# Altium PCB PCB_v0.1.pcbdoc
Units mil, origin at the board's own origin, x right, y up, seen from the top; angles counter-clockwise.
Board outline 2191.1 x 5068.11 mil, 2 copper layers (Top Layer, Bottom Layer); 16 components, 48 nets, 83 pads, 11 vias.
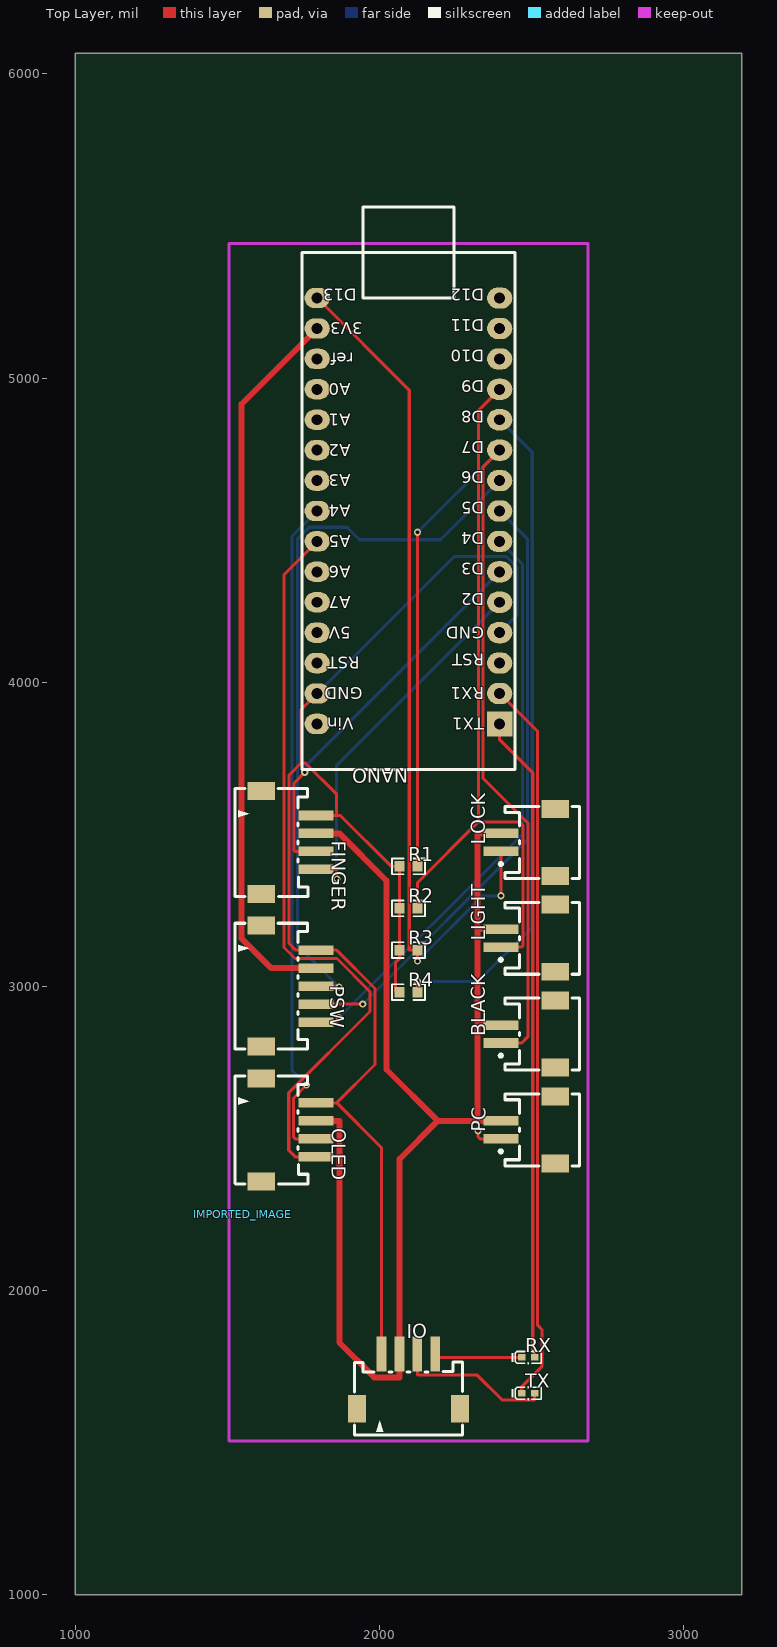
[diagram p0: Top Layer view]
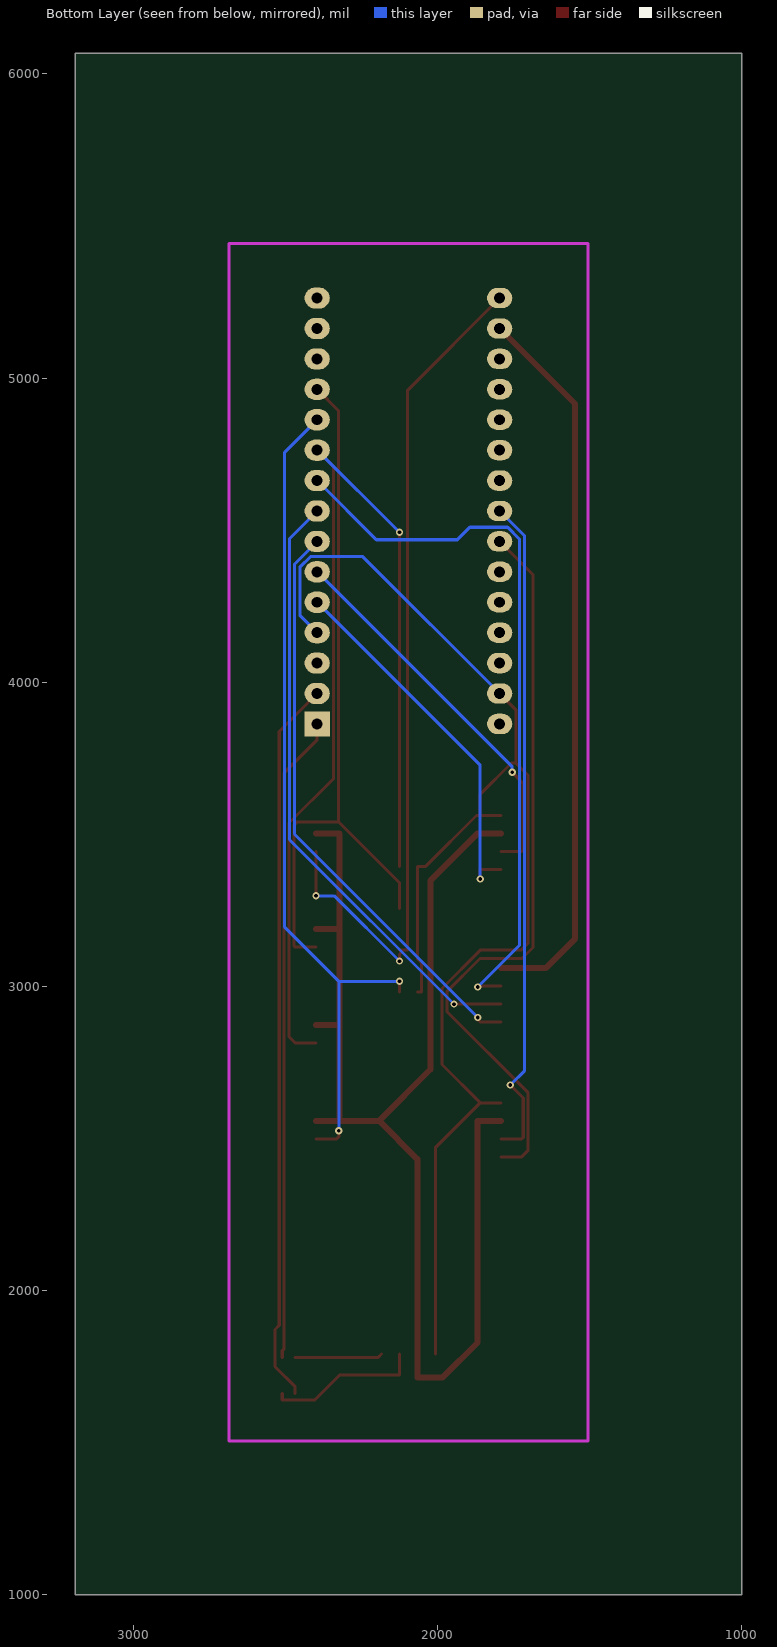
[diagram p1: Bottom Layer view, seen from below]

## Layer stack, top to bottom
Top Layer: signal copper (thickness not stored)
Dielectric: dielectric 12.6, FR-4, Dk 4.8
Bottom Layer: signal copper (thickness not stored)

## Board outline
3191.1,1000 1000,1000 1000,6068.11 3191.1,6068.11

## Components (designator, comment, footprint, x,y, rotation, side; value= is the part's Value field where it differs from the comment)
BLACK "ZH1.5-2P-WT 黑暗模式" CONN-SMD_ZH1.5-2P-WT 2489.25,2843.58 r90 top
FINGER "ZH1.5-4P-WT 指纹" CONN-TH_ZH1.5-4P-WT 1701.85,3473.5 r270 top
IMPORTED_IMAGE "IMPORTED_IMAGE" IMPORTED_IMAGE 1551.15,2250.88 r0 top
IO "ZH1.5-4P-WT IO" CONN-TH_ZH1.5-4P-WT 2095.55,1701.85 r0 top
LIGHT "ZH1.5-2P-WT 拨动开关" CONN-SMD_ZH1.5-2P-WT 2489.25,3158.54 r90 top
LOCK "ZH1.5-2P-WT 锁" CONN-SMD_ZH1.5-2P-WT 2489.25,3473.5 r90 top
NANO "ArduinoNano 蓝版" "ARDUINO NANO VINCENT" 2095.55,4563.11 r180 top
OLED "ZH1.5-4P-WT 0.96 OLED" CONN-TH_ZH1.5-4P-WT 1701.85,2528.62 r270 top
PC "ZH1.5-2P-WT 电脑" CONN-SMD_ZH1.5-2P-WT 2489.25,2528.62 r90 top
PSW "ZH1.5-5P-WT 密码" CONN-SMD_ZH1.5-5P-WT 1701.85,3001.06 r270 top
R1 "10K" R0603 2095.55,3394.76 r0 top
R2 "10K" R0603 2095.55,3256.97 r0 top
R3 "10K" R0603 2095.55,3119.17 r0 top
R4 "10K" R0603 2095.55,2981.38 r0 top
RX "TJ-S1005SW4TGLC6B-A5" LED0402-RD_BLUE 2489.25,1780.59 r0 top
TX "TJ-S1005SW4TGLC6B-A5" LED0402-RD_BLUE 2489.25,1662.48 r0 top

## Footprints (in the part's own frame and the unit in brackets; to place one, negate y for a bottom-side part, rotate by r counter-clockwise, add the part's x,y. Pads: shape width x height; smd on the part's side, far side on the other; paste and mask are expansions set on the pad)
"ARDUINO NANO VINCENT" [mm]
  rect 2.1x2.1 hole 0.914: 1(-7.62,17.78)
  oval 2.1x1.778 hole 0.914: 2(-7.62,15.24) 3(-7.62,12.7) 4(-7.62,10.16) 5(-7.62,7.62) 6(-7.62,5.08) 7(-7.62,2.54) 8(-7.62,0) 9(-7.62,-2.54) 10(-7.62,-5.08) 11(-7.62,-7.62) 12(-7.62,-10.16) 13(-7.62,-12.7) 14(-7.62,-15.24) 15(-7.62,-17.78)
  oval 2.1x1.7 hole 0.914: 16(7.62,-17.78) 17(7.62,-15.24) 18(7.62,-12.7) 19(7.62,-10.16) 20(7.62,-7.62) 21(7.62,-5.08) 22(7.62,-2.54) 23(7.62,0) 24(7.62,2.54) 25(7.62,5.08) 26(7.62,7.62) 27(7.62,10.16) 28(7.62,12.7) 29(7.62,15.24) 30(7.62,17.78)
  silkscreen extent -8.89,-25.4 8.89,21.59
CONN-SMD_ZH1.5-2P-WT [mm]
  rect 0.8x2.9 smd: 1(-0.75,2.275) 2(0.75,2.275)
  rect 1.5x2.3 smd: 3(-2.8,-2.275) 4(2.8,-2.275)
  silkscreen extent -3.01,-4.27 3,2.42
CONN-SMD_ZH1.5-5P-WT [mm]
  rect 0.8x2.9 smd: 1(-3,2.275) 2(-1.5,2.275) 3(0,2.275) 4(1.5,2.275) 5(3,2.275)
  rect 1.5x2.3 smd: 6(5.05,-2.275) 7(-5.05,-2.275)
  silkscreen extent -5.25,-4.48 5.25,1.57
CONN-TH_ZH1.5-4P-WT [mm]
  rect 0.8x2.9 smd: 1(-2.25,2.275) 2(-0.75,2.275) 3(0.75,2.275) 4(2.25,2.275)
  rect 1.5x2.3 smd: 5(4.3,-2.275) 6(-4.3,-2.275)
  silkscreen extent -4.5,-4.48 4.51,1.6
IMPORTED_IMAGE [mil]
LED0402-RD_BLUE [mm]
  rect 0.636x0.54 smd: 1(-0.538,0) 2(0.538,0)
  silkscreen extent -1.39,-0.54 1.09,0.54
R0603 [mil]
  rect 31.75x34.02 smd: 1(-29.65,0) 2(29.66,0)
  silkscreen extent -55,-26 55,26

## Via types
v1: diameter 24.02, hole 12.01, Top Layer to Bottom Layer, 11 vias

## Nets (pads, with @x,y where several pads share a name; then routed paths per layer and width w, separated by ;. In a path a pad name is that pad's centre, name@x,y a point inside that pad or via, vN(x,y) a via of type N, cw(c..) or ccw(c..) an arc to the next point about the centre after c; other vN are vias at no path point)
+5V: NANO.27
CN1_5: FINGER.5
CN1_6: FINGER.6
CN2_6: PSW.6
CN2_7: PSW.7
CN4_3: LOCK.3
CN4_4: LOCK.4
CN5_3: LIGHT.3
CN5_4: LIGHT.4
CN6_3: BLACK.3
CN6_4: BLACK.4
CN7_5: OLED.5
CN7_6: OLED.6
CN8_3: PC.3
CN8_4: PC.4
CN9_3: IO.3 TX.2 | length 509.4
  Top Layer w10: IO.3 2125.08,1723.26 2320.33,1723.26 2402.81,1640.78 2510.44,1640.78 TX.2
CN9_4: IO.4 RX.1 | length 288.4
  Top Layer w10: IO.4 2194.97,1780.59 RX.1
CN9_5: IO.5
CN9_6: IO.6
GND: FINGER.1 IO.1 NANO.4 NANO.29 OLED.1 PSW.1 R1.1 R2.1 R3.1 R4.1 | length 4689.3
  Top Layer w10: OLED.1 1859.58,2617.21 ; FINGER.1 1859.58,3562.09 ; NANO.29 1742.54,3910.1 1742.54,3734.45 ; IO.1 2006.97,2469.82 1859.58,2617.21 ; R4.1 2052.42,2981.38 2052.42,3077.63 2065.89,3091.1 R3.1 R2.1 R1.1 2038.95,3394.77 1871.63,3562.09 1859.58,3562.09 ; 1742.54,3734.45 1756.69,3734.45 1859.58,3631.56 1859.58,3562.09 ; 1742.54,3734.45 1702.65,3694.56 1702.65,3141.92 1725.39,3119.18 1758.41,3119.18 PSW.1 1859.58,3119.18 1985.46,2993.3 1985.46,2743.09 1859.58,2617.21
  Bottom Layer w10: NANO.29 2245.55,4413.11 2417.73,4413.11 2452.6,4378.24 2452.6,4220.16 NANO.4
U1_1: NANO.1 RX.2 | length 2130.1
  Top Layer w10: NANO.1 2395.55,3810.7 2504.16,3702.09 2504.16,1808.57 2510.44,1802.29 RX.2
U1_2: NANO.2 TX.1 | length 2385.3
  Top Layer w10: NANO.2 2520.25,3838.41 2520.25,1886.22 2534.04,1872.43 2534.04,1750.16 2468.06,1684.18 TX.1
U1_3: NANO.3
U1_5: FINGER.4 NANO.5 | length 1232.1
  Top Layer w10: FINGER.4 1859.58,3384.92 v1(1859.58,3353.05)
  Bottom Layer w10: v1(1859.58,3353.05) 1859.58,3727.14 NANO.5
U1_6: FINGER.3 NANO.6 | length 1268.9
  Top Layer w10: v1(1754.72,3703.77) 1719.46,3668.51 1719.46,3447.78 1723.26,3443.98 FINGER.3
  Bottom Layer w10: v1(1754.72,3703.77) 1754.72,3722.28 NANO.6
U1_7: NANO.7 PSW.5 | length 1932.4
  Top Layer w10: PSW.5 1859.58,2882.96 1867.45,2890.83 v1(1867.45,2897.85)
  Bottom Layer w10: v1(1867.45,2897.85) 2470.44,3500.84 2470.44,4388.22 NANO.7
U1_8: NANO.8 PSW.4 | length 2037.2
  Top Layer w10: PSW.4 v1(1945.82,2942.01)
  Bottom Layer w10: v1(1945.82,2942.01) 2486.53,3482.72 2486.53,4472.13 NANO.8
U1_9: NANO.9 PSW.3 | length 2385.9
  Top Layer w10: PSW.3 1859.58,3001.07 1862.67,2997.98 v1@1867.55,2997.98
  Bottom Layer w10: v1@1867.55,2997.98 1730.27,3135.26 1730.27,4470.51 1769.37,4509.61 1893.68,4509.61 1934.78,4468.51 2200.95,4468.51 NANO.9
  other v1: 1867.55,2997.98
U1_10: BLACK.1 NANO.10 R1.2 | length 3589.1
  Top Layer w10: R1.2 v1(2125.21,4492.77) ; NANO.10 2341.37,4708.93 2341.37,3683.79 2488.07,3537.09 2488.07,2834.29 2467.85,2814.07 BLACK.1
  Bottom Layer w10: v1(2125.21,4492.77) NANO.10
U1_11: NANO.11 PC.1 R4.2 | length 2788
  Top Layer w10: R4.2 v1(2125.21,3016.89) ; v1(2324.46,2525.8) 2324.46,2506.18 2331.53,2499.11 PC.1
  Bottom Layer w10: v1(2125.21,3016.89) 2324.46,3016.89 ; v1(2324.46,2525.8) 2324.46,3016.89 ; NANO.11 2502.62,4756.04 2502.62,3195.05 2324.46,3016.89
U1_12: LIGHT.1 NANO.12 R2.2 | length 2440.6
  Top Layer w10: R2.2 2125.21,3341.16 2325.28,3541.23 ; NANO.12 2325.28,4892.84 2325.28,3541.23 ; LIGHT.1 2467.85,3129.03 2471.98,3133.16 2471.98,3530.42 2461.17,3541.23 2325.28,3541.23
U1_13: NANO.13
U1_14: NANO.14
U1_15: NANO.15
U1_16: LOCK.1 NANO.16 R3.2 | length 2847.1
  Top Layer w10: NANO.16 2098.26,4960.4 2098.26,3119.18 R3.2@2111.74,3119.18 ; v1(2125.21,3083.4) 2125.21,3105.71 R3.2@2111.74,3119.18 ; R3.2 R3.2@2111.74,3119.18 ; v1@2399.69,3297.75 LOCK.1
  Bottom Layer w10: v1(2125.21,3083.4) 2339.56,3297.75 v1@2399.69,3297.75
  other v1: 2399.69,3297.75
U1_18: NANO.18
U1_19: NANO.19
U1_20: NANO.20
U1_21: NANO.21
U1_22: NANO.22
U1_23: NANO.23 OLED.3 | length 2205.3
  Top Layer w10: v1(1760.5,2675.92) 1718.15,2633.57 1718.15,2504.21 1723.26,2499.1 OLED.3
  Bottom Layer w10: v1(1760.5,2675.92) 1713.48,2722.94 1713.48,4481.04 NANO.23
U1_24: NANO.24 OLED.4 | length 2454
  Top Layer w10: OLED.4 1723.26,2440.04 1702.06,2461.24 1702.06,2650.2 1969.37,2917.51 1969.37,2982.64 1860.46,3091.55 1722.75,3091.55 1686.22,3128.08 1686.22,4353.78 NANO.24
U1_25: NANO.25
U1_26: NANO.26
U1_28: NANO.28
U1_30: NANO.30
VCC: BLACK.2 FINGER.2 IO.2 LIGHT.2 LOCK.2 OLED.2 PC.2 | length 4485.4
  Top Layer w19.68: OLED.2 1868.2,2558.15 1868.2,1829.26 1982.82,1714.64 2066.03,1714.64 IO.2 2066.03,2432.24 2191.95,2558.16 ; FINGER.2 1868.2,3503.03 2023.3,3347.93 2023.3,2726.81 2191.95,2558.16 ; PC.2 2322.91,2558.16 ; BLACK.2 2330.3,2873.12 2322.91,2873.12 ; LIGHT.2 2322.91,3188.08 ; LOCK.2 2322.91,3503.04 2322.91,3188.08 ; 2191.95,2558.16 2322.91,2558.16 ; 2322.91,2558.16 2322.91,2873.12 ; 2322.91,2873.12 2322.91,3188.08
VEE: NANO.17 PSW.2 | length 2392.9
  Top Layer w19.68: PSW.2 1644.58,3060.12 1547.31,3157.39 1547.31,4914.87 NANO.17

## Silkscreen, mask and mechanical layers (free items; w line width, h text height)
Top Solder:
  text "by:TNTInMinecraft" at 2579.41,2348.11 h80 r270

## Text inside footprints (layer, text, board x,y; h text height)
NANO: Top Overlay "TX1" at 2345.55,3883.11 h40 r180; Top Overlay "GND" at 1945.55,3983.11 h40 r180; Top Overlay "5V" at 1905.55,4183.11 h40 r180; Top Overlay "D12" at 2345.55,5293.11 h40 r180; Top Overlay "Vin" at 1915.55,3883.11 h40 r180; Top Overlay "D13" at 1925.55,5293.11 h40 r180; Top Overlay "GND" at 2345.55,4183.11 h40 r180; Top Overlay "RX1" at 2345.55,3983.11 h40 r180; Top Overlay "RST" at 2345.55,4093.11 h40 r180; Top Overlay "D2" at 2345.55,4293.11 h40 r180; Top Overlay "D3" at 2345.55,4393.11 h40 r180; Top Overlay "D4" at 2345.55,4493.11 h40 r180; Top Overlay "D5" at 2345.55,4593.11 h40 r180; Top Overlay "D6" at 2345.55,4693.11 h40 r180; Top Overlay "D7" at 2345.55,4793.11 h40 r180; Top Overlay "D8" at 2345.55,4893.11 h40 r180; Top Overlay "D9" at 2345.55,4993.11 h40 r180; Top Overlay "D10" at 2345.55,5093.11 h40 r180; Top Overlay "D11" at 2345.55,5193.11 h40 r180; Top Overlay "3V3" at 1945.55,5183.11 h40 r180; Top Overlay "ref" at 1915.55,5083.11 h40 r180; Top Overlay "A0" at 1905.55,4983.11 h40 r180; Top Overlay "A1" at 1905.55,4883.11 h40 r180; Top Overlay "A2" at 1905.55,4783.11 h40 r180; Top Overlay "A3" at 1905.55,4683.11 h40 r180; Top Overlay "A4" at 1905.55,4583.11 h40 r180; Top Overlay "A5" at 1905.55,4483.11 h40 r180; Top Overlay "A6" at 1905.55,4383.11 h40 r180; Top Overlay "A7" at 1905.55,4283.11 h40 r180; Top Overlay "RST" at 1935.55,4083.11 h40 r180